# Altium PCB PCB1.PcbDoc
Units mm, origin at the board's own origin, x right, y up, seen from the top; angles counter-clockwise.
Board outline 112.52 x 45.59 mm, 2 copper layers (Top Layer, Bottom Layer); 30 components, 28 nets, 117 pads, 1 vias.
Unrouted connection lines stored in the file: 69.
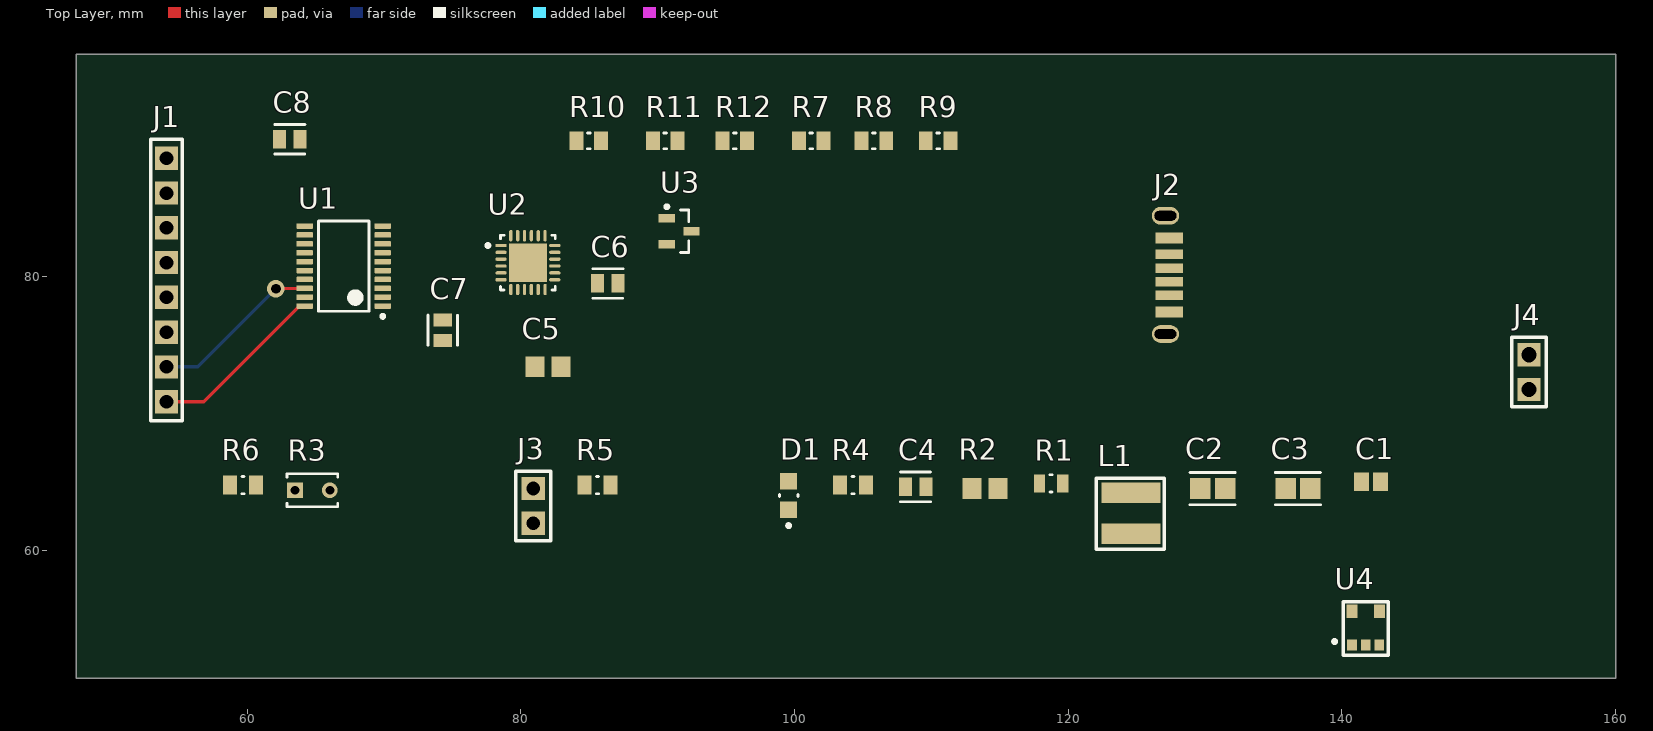
[diagram p0: Top Layer view]
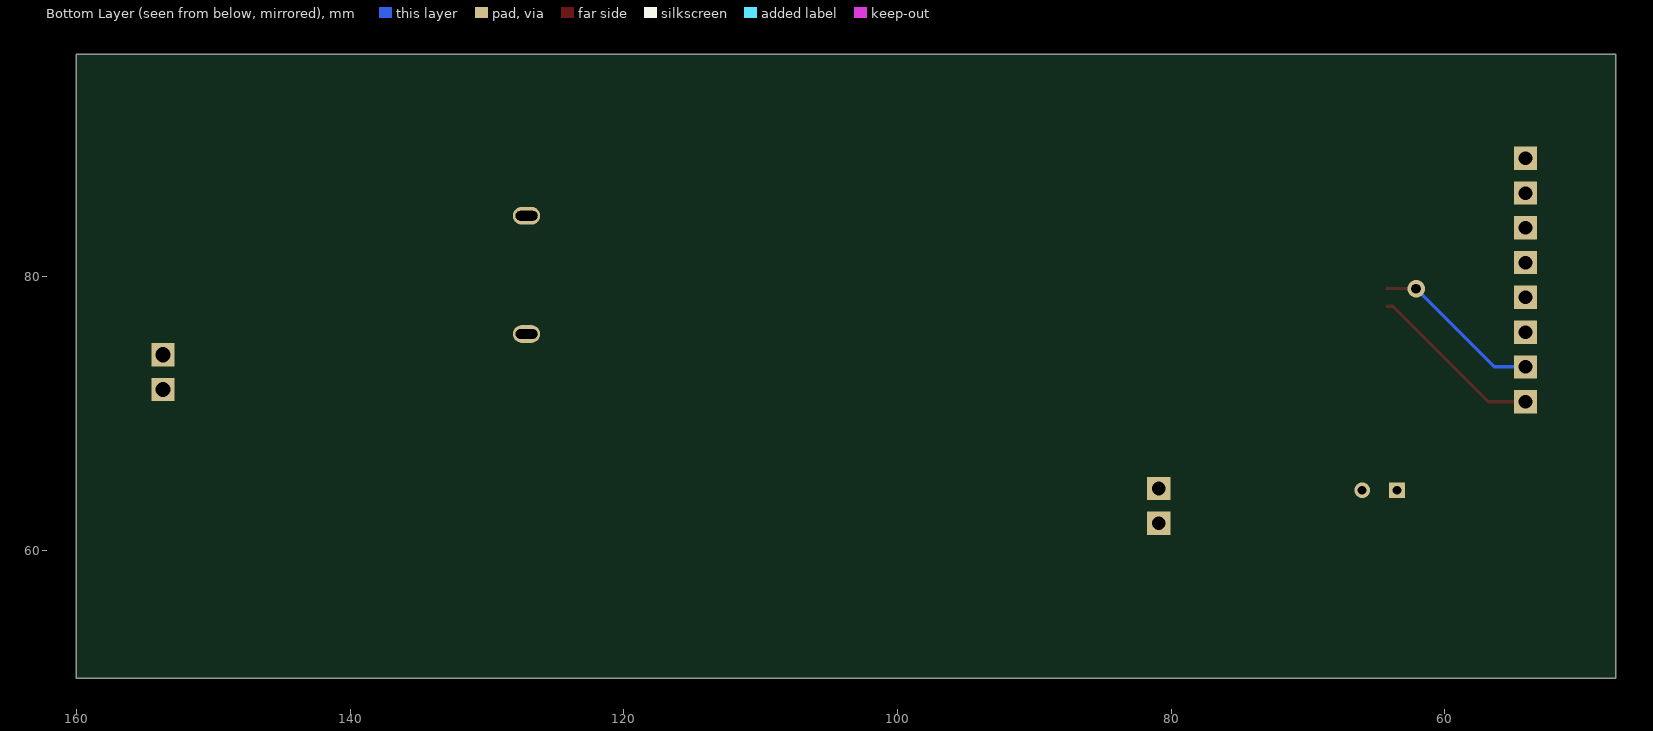
[diagram p1: Bottom Layer view, seen from below]

## Layer stack, top to bottom
Top Solder: solder mask 0.0102, Solder Resist, Dk 3.5
Top Layer: signal copper 0.0356
Dielectric 1: dielectric 0.32, FR-4, Dk 4.8
Bottom Layer: signal copper 0.0356
Bottom Solder: solder mask 0.0102, Solder Resist, Dk 3.5

## Board outline
47.498,50.673 160.02,50.673 160.02,96.266 47.498,96.266

## Design rules (kind name [scope] priority, off if disabled: settings)
Clearance [All] p1: gap=0.254 ignorepadtopadclearanceinfootprint=FALSE
PolygonConnect [All] p1: connectstyle=Relief reliefconductorwidth=0.254 reliefentries=4 polygonreliefangle="90 Angle" airgapwidth=0.254
RoutingVias [All] p1: holewidth=0.711 width=1.27 viastyle="Through Hole" minholewidth=0.711 minwidth=1.27 maxholewidth=0.711 maxwidth=1.27
SolderMaskExpansion [All] p1: expansion=0.102 istentingtop=FALSE
SupplyNets "Schematic Supply Nets_5" [InNet('GND')] p1: voltage=0.000
SupplyNets "Schematic Supply Nets_4" [InNet('+3.3')] p2: voltage=0.000
SupplyNets "Schematic Supply Nets_3" [InNet('VSYS')] p3: voltage=0.000
SupplyNets "Schematic Supply Nets_2" [InNet('+1.8')] p4: voltage=0.000
SupplyNets "Schematic Supply Nets_1" [InNet('VPMID')] p5: voltage=0.000
SupplyNets "Schematic Supply Nets" [InNet('VCC')] p6: voltage=0.000
Width [All] p1: maxlimit=0.254 minlimit=0.254 preferedwidth=0.254
30 further rules are at their usual default settings.

## Classes and differential pairs
component class LevelShift: C7 C8 J1 R7 R8 R9 R10 R11 R12 U1 U3 U4
component class breakout: C1 C2 C3 C4 C5 C6 D1 J2 J3 J4 J? L1 R1 R2 R3 R4 R5 R6 U2

## Components (designator, comment, footprint, x,y, rotation, side; value= is the part's Value field where it differs from the comment)
C1 "C0805C105K3RACTU" CAPC2013X140X50LL20T25 142.113,65.024 r0 top value=1uF
C2 "47uf 0805 SMD" "47uf 0805 SMD" 130.556,64.516 r0 top value=47uF
C3 "47nf 0805 SMD" "47uf 0805 SMD" 136.779,64.516 r0 top value=47nF
C4 "C0805C106K8PACTU" FP-C0805C-DG-MFG 108.839,64.643 r0 top value=10uF
C5 "GRM21BR61C475KA88L" CAPC2013X135X45LL10T25 81.976,73.406 r0 top
C6 "C0805C106K8PACTU" FP-C0805C-DG-MFG 86.36,79.502 r0 top value=10uF
C7 "C0805C106K8PACTU" FP-C0805C-DG-MFG 74.295,76.085 r270 top value=10uF
C8 "C0805C106K8PACTU" FP-C0805C-DG-MFG 63.119,90.043 r0 top value=10uF
D1 "BL-HUF35A-AV-TRB" FP-BL-HUF35A-AV-TRB-MFG 99.568,64.008 r90 top
J1 "8pin 2.54mm header" "8pin 2.54mm header" 54.102,70.866 r90 top
J2 "USBC" USBC 127.381,82.829 r270 top
J3 "2pin 2.54mm header" "2.54mm 2pin header"#1 80.899,61.976 r90 top
J4 "2pin 2.54mm header" "2.54mm 2pin header"#2 153.67,71.755 r90 top
L1 "2.2uH Inductor" "2.2uH Inductor" 124.587,61.214 r90 top value=2.2uH
R1 "CRCW0805160RFKEA" FP-CRCW0805-e3-IPC_C 118.745,64.897 r0 top
R2 "ERA6AEB101V" RESC2013X60X40ML20T25 113.919,64.516 r0 top value=100R
R3 "103AT-2" FP-103AT-2-MFG 64.77,64.389 r0 top
R4 "CRCW08052K20FKEA" FP-CRCW0805-e3-IPC_B 104.267,64.77 r0 top
R5 "CRCW08055K23FKEA" FP-CRCW0805-e3-IPC_B 85.598,64.77 r0 top
R6 "CRCW08052K20FKEA" FP-CRCW0805-e3-IPC_B 59.69,64.77 r0 top
R7 "RC0805FR-0710KL" RESC2013X60X35NL10T20 101.219,89.916 r0 top value=10kR
R8 "RC0805FR-0710KL" RESC2013X60X35NL10T20 105.791,89.916 r0 top value=10kR
R9 "RC0805FR-0710KL" RESC2013X60X35NL10T20 110.49,89.916 r0 top value=10kR
R10 "RC0805FR-0710KL" RESC2013X60X35NL10T20 84.963,89.916 r0 top value=10kR
R11 "RC0805FR-0710KL" RESC2013X60X35NL10T20 90.551,89.916 r0 top value=10kR
R12 "RC0805FR-0710KL" RESC2013X60X35NL10T20 95.631,89.916 r0 top value=10kR
U1 "TXB0108PWR" PW0020A_L 67.056,80.772 r180 top
U2 "BQ25895RTWR" FP-RTW0024H-IPC_B 80.518,81.026 r0 top
U3 "MCP1700" MCP1700-18 91.567,83.312 r0 top
U4 "RT9193-33GB" SOT-23-5 140.732,53.34 r0 top

## Footprints (in the part's own frame and the unit in brackets; to place one, negate y for a bottom-side part, rotate by r counter-clockwise, add the part's x,y. Pads: shape width x height; smd on the part's side, far side on the other; paste and mask are expansions set on the pad)
"2.2uH Inductor" [mm]
  rect 1.5x4.3 smd: 1(0,0) 2(3,0)
  silkscreen extent -1.14,-2.41 4.06,2.54, body extent -0.62,-2.15 3.68,2.15, height 1.5
"2.54mm 2pin header"#1 [mm]
  rect 1.7x1.7 hole 1: 1(0,0) 2(2.54,0)
  silkscreen extent -1.27,-1.27 3.81,1.27, body extent -1.27,-1.27 3.81,1.27, height 8.54
"2.54mm 2pin header"#2 [mm]
  rect 1.7x1.7 hole 1.1: 1(0,0) 2(2.54,0)
  silkscreen extent -1.27,-1.27 3.81,1.27, body extent -1.27,-1.27 3.81,1.27, height 8.54
"8pin 2.54mm header" [mm]
  rect 1.7x1.7 hole 1: 1(0,0) 2(2.54,0) 3(5.08,0) 4(7.62,0) 5(10.16,0) 6(12.7,0) 7(15.24,0) 8(17.78,0)
  silkscreen extent -1.4,-1.14 19.18,1.14, body extent -1.27,-1.27 19.05,1.27, height 8.54
"47uf 0805 SMD" [mm]
  rect 1.505x1.556 smd paste+0 mask+0: 1(-0.901,0) 2(0.901,0)
  silkscreen extent -1.65,-1.18 1.65,1.18, body extent -2.15,-1.28 2.15,1.28, height 0.25
CAPC2013X135X45LL10T25 [mm] "Chip Capacitor, 2-Leads, Body 2.10x1.35mm, IPC High Density"
  rect 1.4x1.5 smd: 1(-0.95,0) 2(0.95,0)
  body extent -1.05,-0.67 1.05,0.67, height 1.35
CAPC2013X140X50LL20T25 [mm] "Chip Capacitor, 2-Leads, Body 2.00x1.25mm, IPC High Density"
  rect 1.1x1.35 smd: 1(-0.7,0) 2(0.7,0)
  body extent -1.1,-0.72 1.1,0.72, height 1.4
FP-103AT-2-MFG [mm]
  rect 1.15x1.15 hole 0.65 paste-2539.97 mask+0: 1(-1.27,0)
  round 1.15 hole 0.65 paste-2539.97 mask+0: 2(1.27,0)
  silkscreen extent -1.85,-1.2 1.85,1.2, body extent -1.95,-1.3 1.95,1.3, height 0.25
FP-BL-HUF35A-AV-TRB-MFG [mm]
  rect 1.2x1.25 smd paste+0 mask+0: 1(-1.05,0) 2(1.05,0)
  silkscreen extent -2.32,-0.67 0.08,0.67, body extent -1.75,-0.77 1.75,0.77, height 0.25
FP-C0805C-DG-MFG [mm]
  rect 0.95x1.35 smd paste+0 mask+0: 1(-0.75,0) 2(0.75,0)
  silkscreen extent -1.11,-1.08 1.1,1.07, body extent -1.4,-0.85 1.4,0.85, height 0.25
FP-CRCW0805-e3-IPC_B [mm]
  rect 1.007x1.408 smd paste+0 mask+0: 1(-0.951,0) 2(0.951,0)
  silkscreen extent -0.07,-0.63 0.07,0.63, body extent -1.7,-0.95 1.7,0.95, height 0.25
FP-CRCW0805-e3-IPC_C [mil]
  rect 31.75x51.5 smd paste+0 mask+0: 1(-33.5,0) 2(33.5,0)
  silkscreen extent -3,-25 3,25, body extent -53,-31 53,31, height 10
FP-RTW0024H-IPC_B [mm]
  rect 0.829x0.239 smd paste+0 mask+0: 1(-1.965,1.25)
  rrect100% 0.829x0.239 smd paste+0 mask+0: 2(-1.965,0.75) 3(-1.965,0.25) 4(-1.965,-0.25) 5(-1.965,-0.75) 6(-1.965,-1.25) 13(1.965,-1.25) 14(1.965,-0.75) 15(1.965,-0.25) 16(1.965,0.25) 17(1.965,0.75) 18(1.965,1.25)
  rrect100% 0.239x0.829 smd paste+0 mask+0: 7(-1.25,-1.965) 8(-0.75,-1.965) 9(-0.25,-1.965) 10(0.25,-1.965) 11(0.75,-1.965) 12(1.25,-1.965) 19(1.25,1.965) 20(0.75,1.965) 21(0.25,1.965) 22(-0.25,1.965) 23(-0.75,1.965) 24(-1.25,1.965)
  rect 2.8x2.8 smd paste-1000 mask+0: 25(0,0)
  silkscreen extent -3.05,-2 2,2, body extent -2.63,-2.63 2.63,2.63, height 0.25
MCP1700-18 [mm]
  rect 1.2x0.6 smd: 1(-0.9,0.95) 2(-0.9,-0.95) 3(0.9,0)
  silkscreen extent -1.02,-1.55 0.7,1.92, body extent -0.7,-1.52 0.7,1.53, height 1.12
PW0020A_L [mm] "SOP, 20-Leads, Body 6.6x4.5mm, Pitch 0.65mm, IPC High Density"
  rrect25% 1.2x0.4 smd: 1(-2.85,2.925) 2(-2.85,2.275) 3(-2.85,1.625) 4(-2.85,0.975) 5(-2.85,0.325) 6(-2.85,-0.325) 7(-2.85,-0.975) 8(-2.85,-1.625) 9(-2.85,-2.275) 10(-2.85,-2.925) 11(2.85,-2.925) 12(2.85,-2.275) 13(2.85,-1.625) 14(2.85,-0.975) 15(2.85,-0.325) 16(2.85,0.325) 17(2.85,0.975) 18(2.85,1.625) 19(2.85,2.275) 20(2.85,2.925)
  silkscreen extent -2.98,-3.3 1.85,3.8, body extent -3.21,-3.25 3.21,3.25, height 1
RESC2013X60X35NL10T20 [mm] "Chip Resistor, 2-Leads, Body 2.1x1.35mm, IPC Medium Density"
  rect 1x1.35 smd: 1(-0.9,0) 2(0.9,0)
  silkscreen extent -0.1,-0.58 0.1,0.58, body extent -1.05,-0.68 1.05,0.67, height 0.6
RESC2013X60X40ML20T25 [mm] "Chip Resistor, 2-Leads, Body 2.00x1.25mm, IPC Low Density"
  rect 1.4x1.55 smd: 1(-0.95,0) 2(0.95,0)
  body extent -1.1,-0.72 1.1,0.72, height 0.6
SOT-23-5 [mm]
  rect 0.7x0.8 smd: 1(0,-0.254) 2(1,-0.254) 3(2,-0.254)
  rect 0.8x1 smd: 4(2,2.2) 5(0,2.2)
  silkscreen extent -1.4,-1.02 2.67,2.92, body extent -0.53,-0.48 2.57,2.51, height 1.3
USBC [mm]
  rect 0.8x2 smd: 1(0,0) 6(5.4,0)
  rect 0.7x2 smd: 2(1.2,0) 3(2.2,0) 4(3.2,0) 5(4.2,0)
  oval 1.3x2 hole 0.7 slot 1.6 at 90 deg: ""(-1.62,-0.28) ""(7.02,-0.28)
  body extent -1.83,-1.18 7.37,6.77, height 3.2

## Part data
C1: library part CMP-2007-03234-1, LCSC=C28323, Manufacturer=Kemet, Part Number=C0805C105K3RACTU
C2: "Ceramic Capacitor, Multilayer, Ceramic, 6.3V, 20% +Tol, 20% -Tol, X5R, 15% TC, 47uF, Surface Mount, 0805", Capacitor Type=Ceramic, Case/Package=0805, LCSC=C16780, Manufacturer=KEMET, Manufacturer Part Number=C0805C476M9PACTU, Max Operating Temperature=85°C, Min Operating Temperature=-55°C, Package Shape=Rectangular, Package Style=SMTMeter, Rated DC Voltage (URdc)=6.3V, Supplier Part Number=80-C0805C476M9P, Temperature Characteristics Code=X5R, Tolerance  (fill in as +-)=20%, Category="Ceramic Capacitors", ComponentLink1Description=https://datasheet.ciiva.com:443/pdfs/VipMasterIC/IC/KEME/KEME-S-A0008991665/KEME-S-A0008991665-1.pdf?src-supplier=IHS+Markit, ComponentLink1URL=https://datasheet.ciiva.com:443/pdfs/VipMasterIC/IC/KEME/KEME-S-A0008991665/KEME-S-A0008991665-1.pdf?src-supplier=IHS+Markit, ComponentLink2Description=https://datasheet.ciiva.com/7842/40889-7842618.pdf?src-supplier=Element14, ComponentLink2URL=https://datasheet.ciiva.com/7842/40889-7842618.pdf?src-supplier=Element14, ComponentLink3Description=https://datasheet.ciiva.com/6137/40889-6137142.pdf?src-supplier=Farnell, ComponentLink3URL=https://datasheet.ciiva.com/6137/40889-6137142.pdf?src-supplier=Farnell, Dielectric Material=Ceramic, Height=1.25mm, JESD-609 Code=e3, Length=2mm, Mounting Technology="Surface Mount", Multilayer=Yes, Packaging="Tape and Reel", Pins=2, Pricing="1=0.87, 10=0.561, 50=0.561, 100=0.438, 1000=0.436, 10000=0.247 (USD)", Reach SVHC Compliant=Yes, RoHS=Yes, RoHS Compliant=Yes, Stock=168175, Supplier=Mouser, Terminal Finish=Nickel, Termination=Wraparound, Tolerance (fill in as +-)=20%, Width=1.25mm
C3: library part "47uf 0805 SMD", "Ceramic Capacitor, Multilayer, Ceramic, 6.3V, 20% +Tol, 20% -Tol, X5R, 15% TC, 47uF, Surface Mount, 0805", Capacitor Type=Ceramic, Case/Package=0805, LCSC=C2915681, Manufacturer=KEMET, Manufacturer Part Number=C0805C476M9PACTU, Max Operating Temperature=85°C, Min Operating Temperature=-55°C, Package Shape=Rectangular, Package Style=SMTMeter, Rated DC Voltage (URdc)=6.3V, Supplier Part Number=80-C0805C476M9P, Temperature Characteristics Code=X5R, Tolerance  (fill in as +-)=20%, Category="Ceramic Capacitors", ComponentLink1Description=https://datasheet.ciiva.com:443/pdfs/VipMasterIC/IC/KEME/KEME-S-A0008991665/KEME-S-A0008991665-1.pdf?src-supplier=IHS+Markit, ComponentLink1URL=https://datasheet.ciiva.com:443/pdfs/VipMasterIC/IC/KEME/KEME-S-A0008991665/KEME-S-A0008991665-1.pdf?src-supplier=IHS+Markit, ComponentLink2Description=https://datasheet.ciiva.com/7842/40889-7842618.pdf?src-supplier=Element14, ComponentLink2URL=https://datasheet.ciiva.com/7842/40889-7842618.pdf?src-supplier=Element14, ComponentLink3Description=https://datasheet.ciiva.com/6137/40889-6137142.pdf?src-supplier=Farnell, ComponentLink3URL=https://datasheet.ciiva.com/6137/40889-6137142.pdf?src-supplier=Farnell, Dielectric Material=Ceramic, Height=1.25mm, JESD-609 Code=e3, Length=2mm, Mounting Technology="Surface Mount", Multilayer=Yes, Packaging="Tape and Reel", Pins=2, Pricing="1=0.87, 10=0.561, 50=0.561, 100=0.438, 1000=0.436, 10000=0.247 (USD)", Reach SVHC Compliant=Yes, RoHS=Yes, RoHS Compliant=Yes, Stock=168175, Supplier=Mouser, Terminal Finish=Nickel, Termination=Wraparound, Tolerance (fill in as +-)=20%, Width=1.25mm
C4 C6 C7 C8: library part CMP-2007-03243-2, "CAP CER 10UF 10V X5R 0805", 3DS Part Number=220-00001, Capacitance=10uF, LCSC=C15850, Manufacturer=Kemet, Package=C0805C-DG, Temperature="-55°C to +85°C", Temperature Characteristic=X5R, Temperature Coefficient=15%, Temperature Range High=+85°C, Temperature Range Low=-55°C, Tolerance=10%, Voltage=10V, Automotive=No, Category=Cap, ComponentLink2Description=Datasheet, ComponentLink2URL=https://content.kemet.com/datasheets/KEM_C1006_X5R_SMD.pdf, Device Class L1="Passive Components", Device Class L2=Capacitors, Device Class L3="Ceramic Capacitors", Digikey Description="CAP CER 10UF 10V X5R 0805", Height=1.4mm, Ipc Land Pattern Name=CAPC200125X125, Lead Free=Yes, Manufacturer Part Number=C0805C106K8PACTU, Material=Ceramic, Mouser Description="CAP CER 10UF 10V X5R 0805", Octopart=https://octopart.com/c0805c106k8pactu-kemet-98697, RoHS=TRUE, Voltage Rating=10V
C5: library part CMP-1662-00015-2, "Chip Capacitor, 4.7 uF, +/- 10%, 16 V, -55 to 85 degC, 0805 (2012 Metric), RoHS, Tape and Reel", Capacitance="4.7 uF", Case Code (Imperial)=0805, Case Code (Metric)=2012, LCSC=C1779, Max Operating Temperature="85 degC", Min Operating Temperature="-55 degC", Package Quantity=3000, Tolerance=10%, Type (Capacitors)=X5R, Voltage Rating="16 V", Case\/Package=0805, ComponentLink1Description="Manufacturer URL", ComponentLink1URL=http://www.murata.com/, ComponentLink2Description=Datasheet, ComponentLink2URL=http://search.murata.co.jp/Ceramy/image/img/A01X/G101/ENG/GRM21BR61C475KA88-01.pdf, DatasheetVersion=03/2016, Height="1.25 mm", Length="2 mm", Mount="Surface Mount", Mounting Technology="Surface Mount", PackageDescription="2-Pin Surface Mount Device, Body 2 x 1.25 mm", PackageReference=0805, Packaging="Tape and Reel", PartNumber=GRM21BR61C475KA88L, Pins=2, Radiation Hardening=No, REACH SVHC="No SVHC", RoHSCompliant=true, Voltage Rating (DC)="16 V", Width="1.25 mm"
D1: library part CMP-03430-128560092-1, Case/Package=0805, Color=Red, Forward Current=20mA, Forward Voltage=2.2V, LCSC=C94741, Max Operating Temperature=85°C, Min Operating Temperature=-40°C, Power Dissipation=50mW, Reverse Voltage=5V, Height=1.1mm, Luminous Intensity=80mcd, NexarPartId=128560092, Viewing Angle=120°, Wavelength=635nm
J2: LCSC=C5187411
L1: "±20% 6.5A 6A Integrated molded inductor 2.2uH SMD,4x4mm Power Inductors ROHS", Current=6A, LCSC=C20417190
R1: library part CMP-1013-00418-2, "RES Thick Film, 160Ω, 1%, 0.125W, 100ppm/°C, 0805", Case Code (Imperial)=0805, Case Code (Metric)=2012, LCSC=C25269, Max Operating Temperature=155°C, Max Power Dissipation=125mW, Min Operating Temperature=-55°C, Package Quantity=10, Resistance=160R, Temperature Coefficient=100ppm/°C, Tolerance=1%, Voltage Rating=150V, Case/Package=0805, Composition="Thick Film", Depth=1.25mm, Features="Automotive AEC-Q200", Height=0.02inch, Lead Free="Lead Free", Length=2mm, Military Standard=Not, Number of Pins=2, Number of Terminations=2, Packaging="Tape and Reel", Power Rating=125mW, Termination=SMD/SMT, Voltage Rating (DC)=150V, Weight=0.000194oz, Width=0.049inch
R2: library part CMP-2001-00580-1, LCSC=C25269, Manufacturer=Panasonic, Part Number=ERA6AEB101V
R3: library part CMP-2000-05824-2, "Thermistor NTC 10KOhm 1% 2-Pin", Max Operating Temperature=110°C, Min Operating Temperature=-50°C, Resistance=10kR, Tolerance=1%, Height=2.4mm, Lead Pitch=2.54mm, Length=17mm, Number of Pins=2, Packaging=Bulk, RoHS Compliant=Yes, Series=AT, Termination=Radial, Width=3.7mm
R4: library part CMP-2001-03760-2, "RES Thick Film, 2.2kΩ, 1%, 0.125W, 100ppm/°C, 0805", Case Code (Imperial)=0805, Case Code (Metric)=2012, LCSC=C163971, Max Operating Temperature=155°C, Max Power Dissipation=125mW, Min Operating Temperature=-55°C, Package Quantity=10, Resistance=2.2kR, Temperature Coefficient=100ppm/°C, Tolerance=1%, Voltage Rating=150V, Case/Package=0805, Composition="Thick Film", Contact Plating=Tin, Depth=1.25mm, Features="Automotive AEC-Q200", Height=0.45mm, Lead Free="Lead Free", Length=2mm, Military Standard=Not, Number of Terminations=2, Packaging="Tape and Reel", Power Rating=125mW, Radiation Hardening=No, Termination=SMD/SMT, Voltage Rating (DC)=150V, Weight=0.000194oz, Width=1.25mm
R5: library part CMP-2001-04027-2, "RES Thick Film, 5.23kΩ, 1%, 0.125W, 100ppm/°C, 0805", Case Code (Imperial)=0805, Case Code (Metric)=2012, LCSC=C2933464, Max Operating Temperature=155°C, Max Power Dissipation=125mW, Min Operating Temperature=-55°C, Package Quantity=10, Resistance=5.23kR, Temperature Coefficient=100ppm/°C, Tolerance=1%, Voltage Rating=150V, Case/Package=0805, Composition="Thick Film", Contact Plating=Tin, Depth=1.25mm, Features="Automotive AEC-Q200", Height=0.45mm, Lead Free="Lead Free", Length=2mm, Military Standard=Not, Number of Pins=2, Number of Terminations=2, Packaging="Tape and Reel", Power Rating=125mW, Termination=SMD/SMT, Voltage Rating (DC)=150V, Weight=0.000194oz, Width=1.25mm, Working Voltage=150V
R6: library part CMP-2001-03760-2, "RES Thick Film, 2.2kΩ, 1%, 0.125W, 100ppm/°C, 0805", Case Code (Imperial)=0805, Case Code (Metric)=2012, LCSC=C21841, Max Operating Temperature=155°C, Max Power Dissipation=125mW, Min Operating Temperature=-55°C, Package Quantity=10, Resistance=30.1kR, Temperature Coefficient=100ppm/°C, Tolerance=1%, Voltage Rating=150V, Case/Package=0805, Composition="Thick Film", Contact Plating=Tin, Depth=1.25mm, Features="Automotive AEC-Q200", Height=0.45mm, Lead Free="Lead Free", Length=2mm, Military Standard=Not, Number of Terminations=2, Packaging="Tape and Reel", Power Rating=125mW, Radiation Hardening=No, Termination=SMD/SMT, Voltage Rating (DC)=150V, Weight=0.000194oz, Width=1.25mm
R7 R8 R9 R10 R11 R12: library part CMP-1659-00013-4, "Chip Resistor, 10 KOhm, +/- 1%, 0.125 W, -55 to 155 degC, 0805 (2012 Metric), RoHS, Tape and Reel", LCSC=C84376, Manufacturer=Yageo, Max Operating Temperature="155 degC", Min Operating Temperature="-55 degC", Package Quantity=5000, Voltage Rating="150 V", ComponentLink1Description="Manufacturer URL", ComponentLink1URL=http://www.yageo.com/, ComponentLink2Description=Datasheet, ComponentLink2URL=http://www.yageo.com/documents/recent/PYu-RC_Group_51_RoHS_L_04.pdf, DatasheetVersion="Rev. 4, 02/2016", Height="0.5 mm", Length="2 mm", Mount="Surface Mount", Mounting Technology="Surface Mount", PackageDescription="2-Pin Surface Mounted Device, Body 2 x 1.25 mm", PackageReference=0805, Pins=2, REACH SVHC="No SVHC", RoHSCompliant=true
U1: library part CMP-2000-07337-1, "TXB0108 8-Bit Bidirectional Voltage-Level Translator with Auto-Direction Sensing and / +/- 15-kV ESD Protection, 1.2 to 3.6 V, -40 to 85 degC, 20-Pin TSSOP (PW), Green (RoHS & no Sb/Br), Tape and Reel", LCSC=C53406, Manufacturer="Texas Instruments", Operating Temperature=-40°C~85°C, Package / Case="20-TSSOP(0.173\",4.40mmWidth)", Package Description="20-Pin Small Outline Package Integrated Circuit, Body 6.5 x 4.4 mm, Pitch 0.65 mm", Package Reference=PW20, Package Version="4040064-5/G, 02/2011", Standard Package=1, Supplier Device Package=20-TSSOP, Voltage - Supply=1.2V~3.6V,1.65V~5.5V, Category=IntegratedCircuits(ICs), Data Rate=100Mbps, Datasheet URL=http://www.ti.com/general/docs/lit/getliterature.tsp?genericPartNumber=TXB0108&fileType=pdf, Datasheet Version="Rev. F, 12/2014", Differential - Input=Output:No/No, Dynamic Catalog=TXBSeries, Family=Logic-Translators, Input Type=Logic, Logic Function=Translator,Bidirectional, Manufacturer URL=http://www.ti.com/, Mounting Technology=SurfaceMount, Number of Bits=8, Number of Channels=8, Number of Outputs/Channel=1, Other Names=296-21527-6, Output Type=Logic, Package URL=http://www.ti.com/litv/pdf/mpds362, Packaging=Digi-Reel®, Product Training Modules=VoltageLevelTranslation, Propagation Delay (Max)=4ns, Series=-
U2: library part CMP-04911-000061-1, "IC NVDC CHARGER I2C 24WQFN", Max Operating Temperature=85°C, Min Operating Temperature=-40°C, Operating Supply Voltage=14V, Output Current=5A, Output Voltage=4.6V, Contact Plating=Gold, Lead Free="Lead Free", Mount="Surface Mount", Number of Cells=1, RoHS Compliant=Yes
U3: "Fixed Positive LDO Regulator, 1.8V, 0.35V Dropout, CMOS, PDSO3", Case/Package=TSOP, Dropout Voltage1-Max=350mV, Dropout Voltage1-Nom=150mV, Input Voltage Absolute-Max=6.5V, LCSC=C150796, Manufacturer=Microchip, Manufacturer Part Number=MCP1700T-1802E/TT, Max Supply Voltage=6V, Min Input Voltage=2.3V, Operating Temperature, TJ-Max=125°C, Operating Temperature, TJ-Min=-40°C, Output Current1-Max=200mA, Output Voltage1-Max=1.854V, Output Voltage1-Min=1.746V, Output Voltage1-Nom=1.8V, Package Body Material=Plastic, Package Equivalence Code=TO-243, Package Shape=Rectangular, Peak Reflow Temperature (Cel)=260°C, Time @ Peak Reflow Temperature-Max (s)=40s, Voltage Tolerance-Max=3%, Adjustability=FIXED, Category="Voltage Regulators - Linear", Channels=1, ComponentLink1Description=https://datasheet.ciiva.com:443/pdfs/VipMasterIC/IC/MCHP/MCHP-S-A0006757370/MCHP-S-A0006757370-1.pdf?src-supplier=IHS+Markit, ComponentLink1URL=https://datasheet.ciiva.com:443/pdfs/VipMasterIC/IC/MCHP/MCHP-S-A0006757370/MCHP-S-A0006757370-1.pdf?src-supplier=IHS+Markit, Height - Seated (Max)=1.12mm, JESD-30 Code=R-PDSO-G3, JESD-609 Code=e3, Length=2.92mm, Moisture Sensitivity Level=1, Number of Outputs=1, Packaging="Tape and Reel", Pins=3, Pricing="3000=0.381 (USD)", Qualification Status="Not Qualified", Reach SVHC Compliant=Yes, Regulator Type="FIXED POSITIVE SINGLE OUTPUT LDO REGULATOR", RoHS=Yes, RoHS Compliant=Yes, Stock=12000, Supplier="Arrow Electronics", Supplier Part Number=MCP1700T-1802E/TT, Surface Mount=Yes, Technology=CMOS, Terminal Finish=Tin, Terminal Form="Gull Wing", Terminal Pitch=0.95mm, Terminal Position=DUAL, Width=1.3mm

## Via types
v1: diameter 1.27, hole 0.711, Top Layer to Bottom Layer, 1 vias

## Nets (pads, with @x,y where several pads share a name; then routed paths per layer and width w, separated by ;. In a path a pad name is that pad's centre, name@x,y a point inside that pad or via, vN(x,y) a via of type N, cw(c..) or ccw(c..) an arc to the next point about the centre after c; other vN are vias at no path point)
+1.8: C7.1 R7.1 R8.1 R9.1 U1.2 U3.2
+3.3: J1.6 R10.1 R11.1 R12.1 U1.19
CE: U1.6 U2.9
D+: J2.3 U2.2
D-: J2.4 U2.3
GND: C1.1 C2.1 C4.2 C5.2 C6.2 C7.2 C8.2 J1.7 J1.8 J2.1 J2.6 J3.2 R2.1 U1.10 U1.11 U2.17 U2.18 U2.25 U3.1
HCE: J1.5 U1.15
HINT: J1.3 R12.2 U1.17
HOTG: J1.4 U1.16
HSDA: J1.1 R10.2 U1.20 | length 13
  Top Layer w0.254: J1.1 56.825,70.866 63.806,77.847 U1.20
HSLA: J1.2 R11.2 U1.18 | length 12.5
  Top Layer w0.254: v1(62.103,79.121) 62.116,79.134 64.193,79.134 U1.18
  Bottom Layer w0.254: J1.2 56.388,73.406 v1(62.103,79.121)
INT: R7.2 U1.4 U2.7
NetC3_1: C3.1 U2.19 U2.20
NetC3_2: C3.2 U2.21
NetC6_1: C6.1 U2.13 U2.14
NetD1_1: D1.1 R4.1
NetJ4_2: J4.2 R3.2 R6.2
NetR1_1: R1.1 R2.2
NetR1_2: R1.2 U2.10
NetR4_2: R4.2 U2.4
OTG: U1.5 U2.8
REGN: C5.1 R5.1 U2.22
SCL: R8.2 U1.3 U2.5
SDA: R9.2 U1.1 U2.6
TS: J4.1 R3.1 R5.2 R6.1
VCC: C1.2 J2.2 J2.5 J3.1 U2.1
VPMID: C2.2 U2.23
VSYS: C4.1 C8.1 D1.2 U2.15 U2.16 U3.3
pads on no net: J2. L1.1 L1.2 U1.7 U1.8 U1.9 U1.12 U1.13 U1.14 U2.11 U2.12 U2.24 U4.1 U4.2 U4.3 U4.4 U4.5